# EAGLE board air_cape_board_led2 (EAGLE 9.0.0)
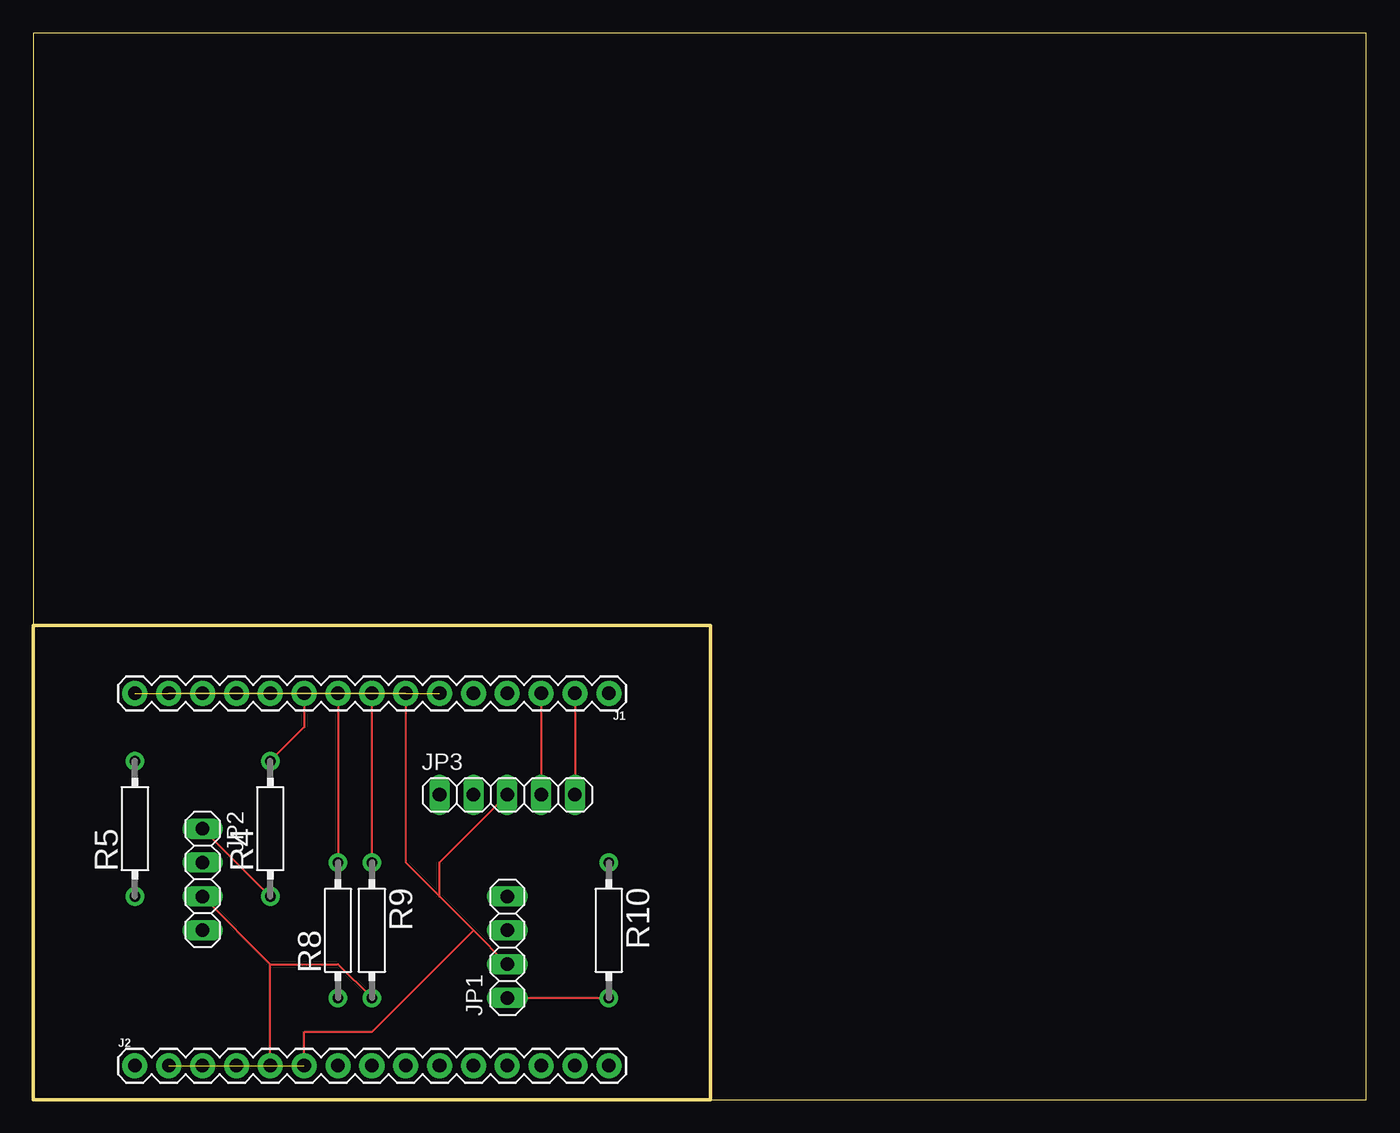
[diagram p0: board, top side]
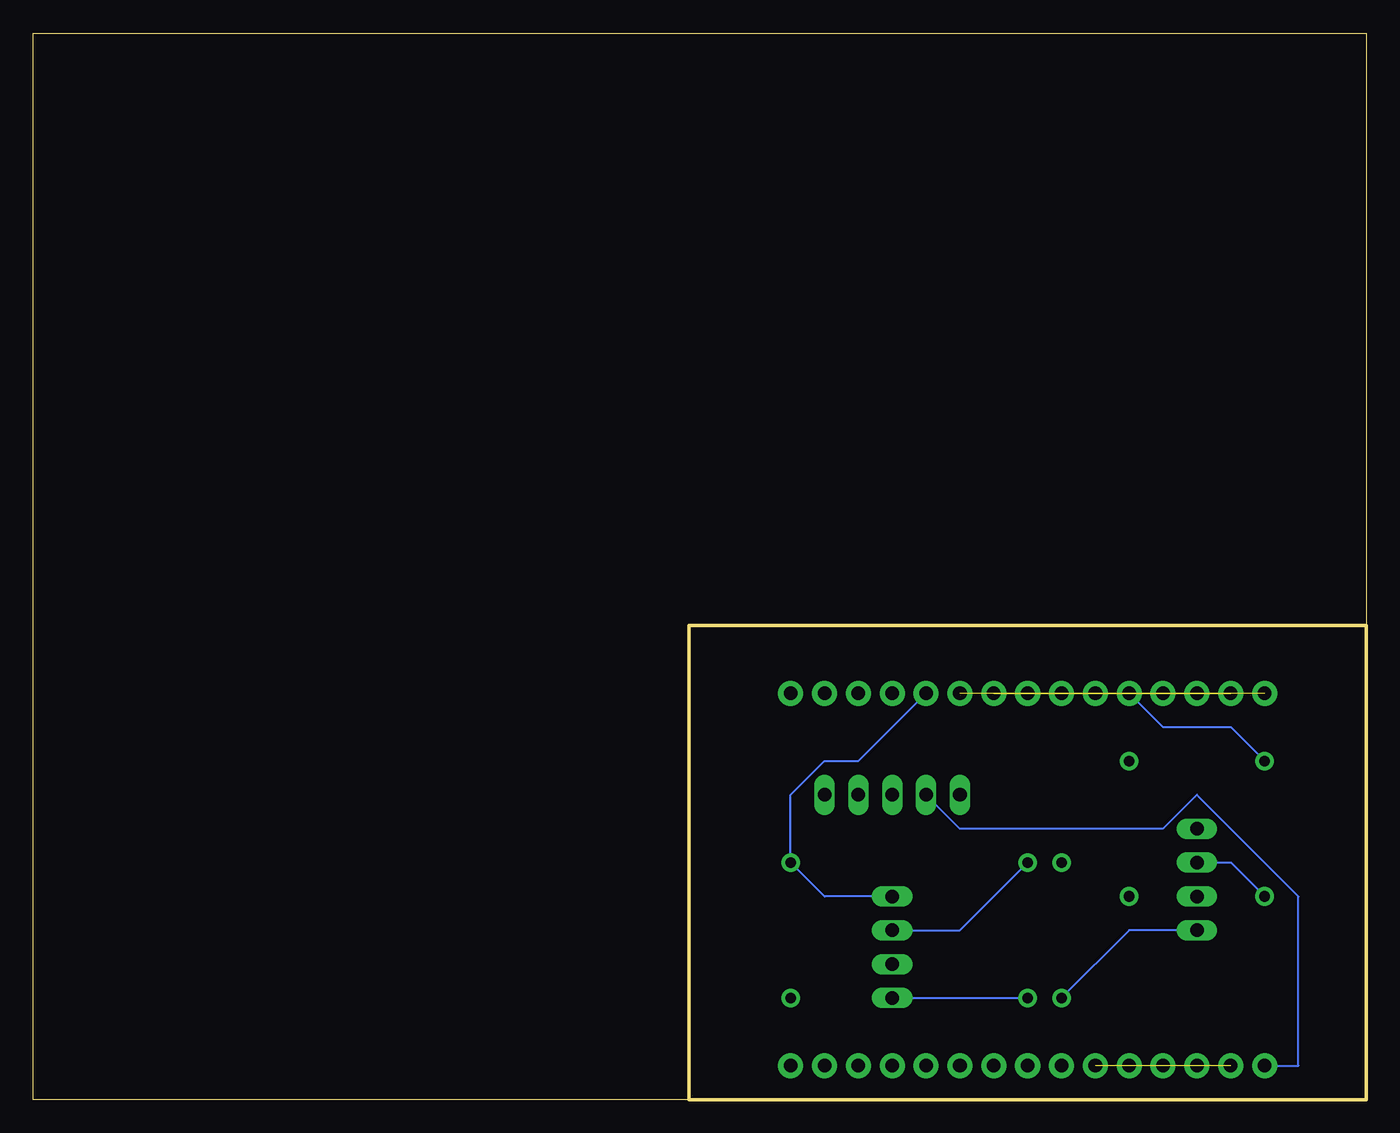
[diagram p1: board, bottom side, seen from below]

Size 100 x 80 mm. Coordinates in mm from the lower left corner, seen from the top.
Outline: 50.8,0 100,0 100,80 0,80 0,0
Outline: 0,0 0,35.56 50.8,35.56 50.8,0
Outline: 50.8,0 0,0
Copper layers (1*16): Top 0.035mm / dielectric 1.5mm / Bottom 0.035mm
Design rules "default *": minimum track width 6mil, minimum drill 0.35mm, track to track 2mil, track to pad 6mil, pad to pad 6mil, via to via 6mil, smd to smd 6mil, copper to edge 40mil, drill to drill 6mil, minimum pad ring 10mil, minimum via ring 8mil, stop-mask expansion 4mil, vias tented up to drill 0mil, thermal gap 10mil

## Footprints (pad centres in the part's own frame; a part is rotated, then mirrored left to right if it is on the bottom)
1X15 = drill 1.016 pad 1.88: 1 0,0; 2 2.54,0; 3 5.08,0; 4 7.62,0; 5 10.16,0; 6 12.7,0; 7 15.24,0; 8 17.78,0; 9 20.32,0; 10 22.86,0; 11 25.4,0; 12 27.94,0; 13 30.48,0; 14 33.02,0; 15 35.56,0
1X04 = drill 1.016 long: 1 -3.81,0; 2 -1.27,0; 3 1.27,0; 4 3.81,0
1X05 = drill 1.016 long: 1 -5.08,0; 2 -2.54,0; 3 0,0; 4 2.54,0; 5 5.08,0
RS1/4 = drill 0.8 pad 1.4: 1 -5.08,0; 2 5.08,0

## Placement (x,y rotation side)
J1  [1X15]  43.18,30.48 180 top
J2  [1X15]  7.62,2.54 0 top
JP1  BME280  [1X04]  35.56,11.43 90 top
JP2  RGB  [1X04]  12.7,16.51 270 top
JP3  SDS011  [1X05]  35.56,22.86 0 top
R4  10  [RS1/4]  17.78,20.32 90 top
R5  10  [RS1/4]  7.62,20.32 90 top
R8  47  [RS1/4]  22.86,12.7 90 top
R9  5.9k  [RS1/4]  25.4,12.7 270 top
R10  11.8k  [RS1/4]  43.18,12.7 270 top

## Library data of the parts
J1 J2 = SparkFun-Connectors
JP1-JP3 = pinhead
R4 R5 R8-R10 = resistor-power; MF: OHMITE; MPN: RRS1K0; OC_FARNELL: unknown; OC_NEWARK: 01F7661

## Nets
3V3: J1.6 J1.15
+3V3: J2.5 JP1.1 JP2.3 R9.2 R10.2
+5V: J2.1 JP3.2
A0: J2.15
ADC: J2.14
CLK: J2.7
D0: J1.1
D1_SDS011_TX: J1.2 JP3.5
D2_SDS011_RX: J1.3 JP3.4
D3: J1.4
D4_I2C_SDA: J1.5 JP1.4 R10.1
D5_I2C_SCL: J1.8 JP1.3 R9.1
D6_LED_RED: J1.9 R8.2
D7_LED_BLUE: J1.10 R4.2
D8_LED_GREEN: J1.11 R5.2
EN: J2.4
GND: J1.7 J1.14 J2.2 J2.6 JP1.2 JP3.3
N$1: JP2.4 R8.1
N$2: JP2.2 R5.1
N$3: JP2.1 R4.1
NC: J2.13
RST: J2.3
RX: J1.12
SC: J2.9
SD0: J2.8
SD1: J2.10
SD2: J2.11
SD3: J2.12
TX: J1.13

## Tracks (layer width: path | path; a pad name or v marks a point on that pad's centre or on a via)
3V3  (1 unrouted)
+3V3
  Top 0.152: JP1.1 R10.2 | 17.78,10.16 JP2.3 | J2.5 17.78,10.16 | R9.2 22.86,10.16 17.78,10.16
  Bottom 0.152: JP1.1 R9.2
+5V
  Bottom 0.152: JP3.2 30.48,20.32 15.24,20.32 12.7,22.86 5.08,15.24 5.08,2.54 J2.1
D1_SDS011_TX
  Top 0.152: J1.2 JP3.5
D2_SDS011_RX
  Top 0.152: J1.3 JP3.4
D4_I2C_SDA
  Bottom 0.152: JP1.4 40.64,15.24 R10.1 43.18,22.86 40.64,25.4 38.1,25.4 J1.5
D5_I2C_SCL
  Top 0.152: R9.1 J1.8
  Bottom 0.152: R9.1 30.48,12.7 JP1.3
D6_LED_RED
  Top 0.152: J1.9 R8.2
D7_LED_BLUE
  Top 0.152: R4.2 20.32,27.94 J1.10
D8_LED_GREEN
  Bottom 0.152: R5.2 10.16,27.94 15.24,27.94 J1.11
GND  (2 unrouted)
  Top 0.152: 30.48,15.24 27.94,17.78 J1.7 | 30.48,15.24 33.02,12.7 | 33.02,12.7 JP1.2 | JP3.3 30.48,17.78 30.48,15.24 | 33.02,12.7 25.4,5.08 20.32,5.08 J2.6
N$1
  Bottom 0.152: R8.1 17.78,12.7 JP2.4
N$2
  Bottom 0.152: R5.1 10.16,17.78 JP2.2
N$3
  Top 0.152: JP2.1 R4.1